# Altium PCB ControlAccess.PcbDoc
Units mil, origin at the board's own origin, x right, y up, seen from the top; angles counter-clockwise.
Board outline 2680.03 x 3305.03 mil, 2 copper layers (Top Layer, Bottom Layer); 16 components, 21 nets, 94 pads, 0 vias.
Unrouted connection lines stored in the file: 5.
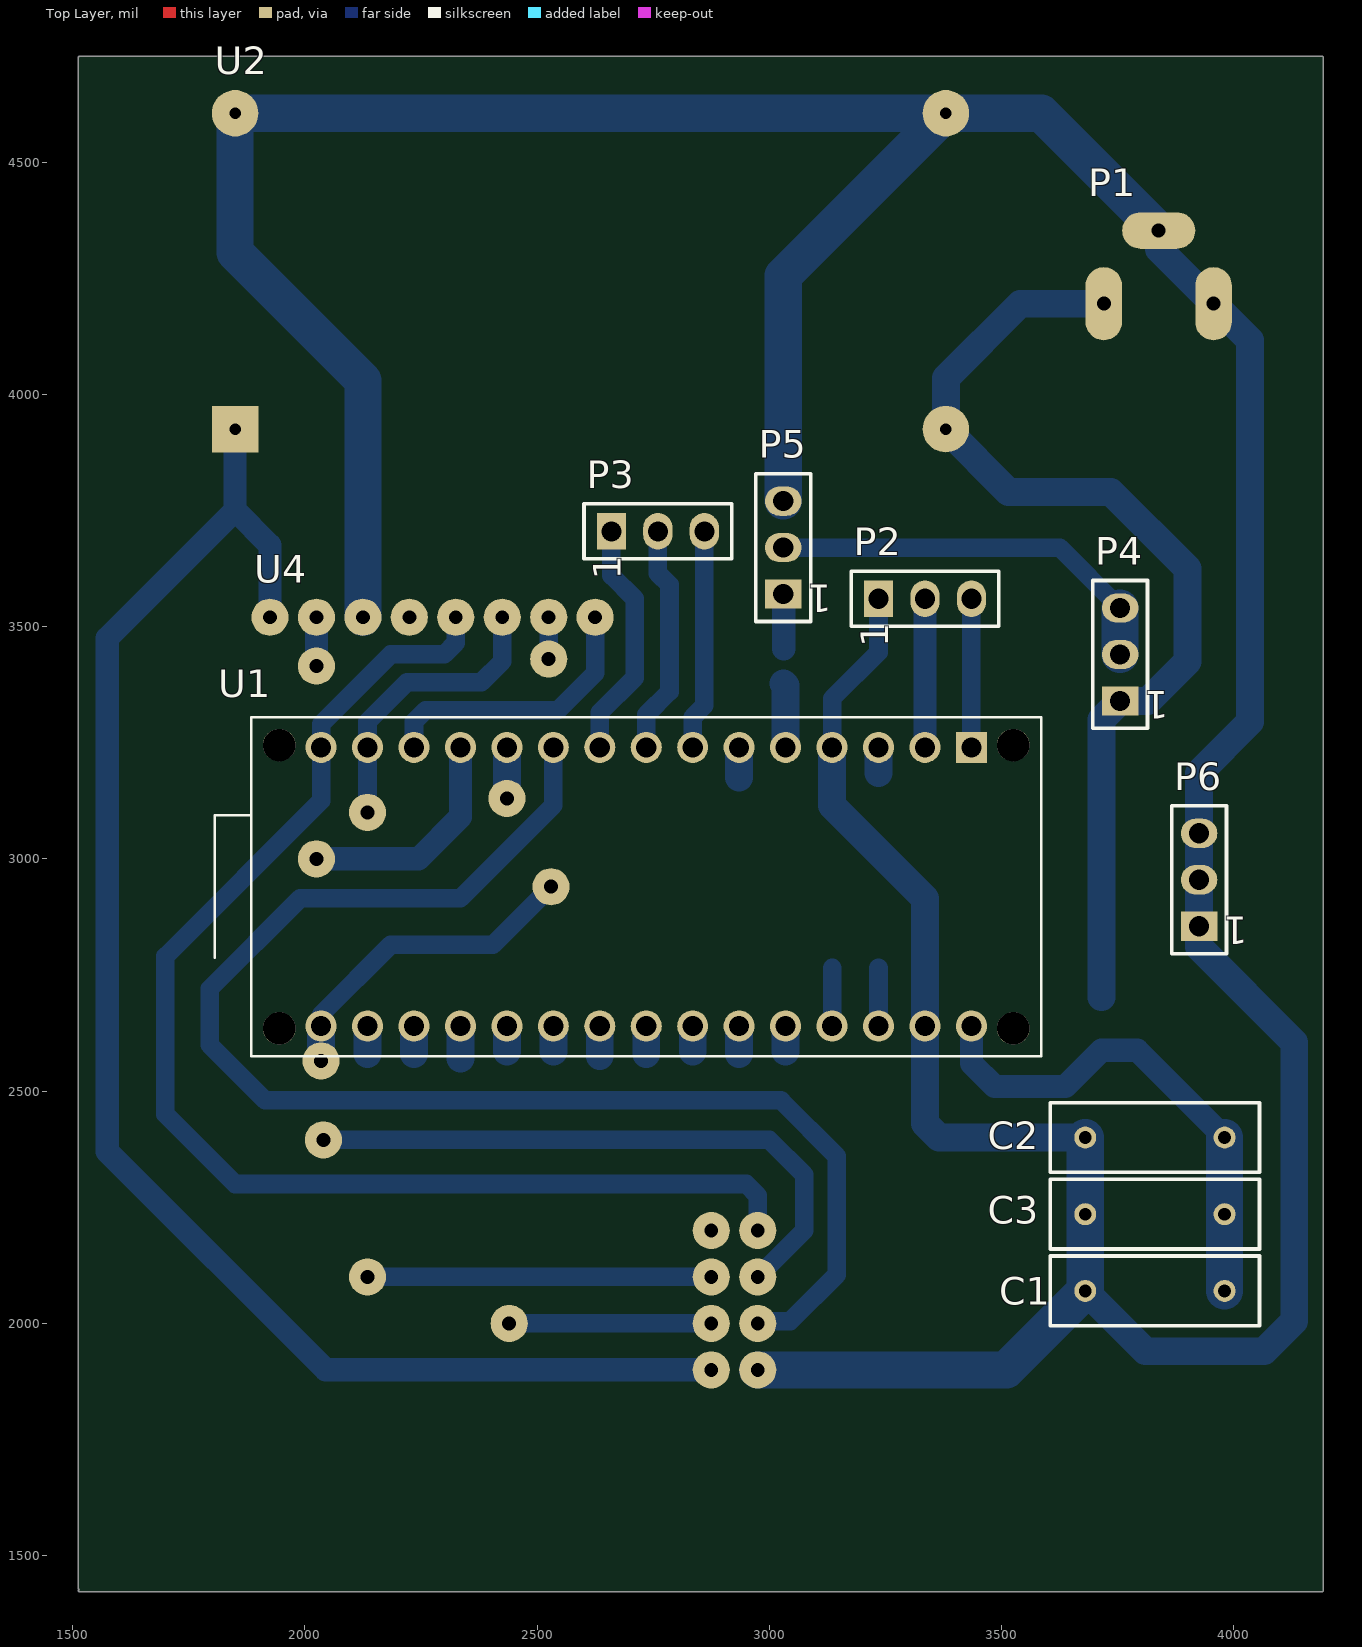
[diagram p0: Top Layer view]
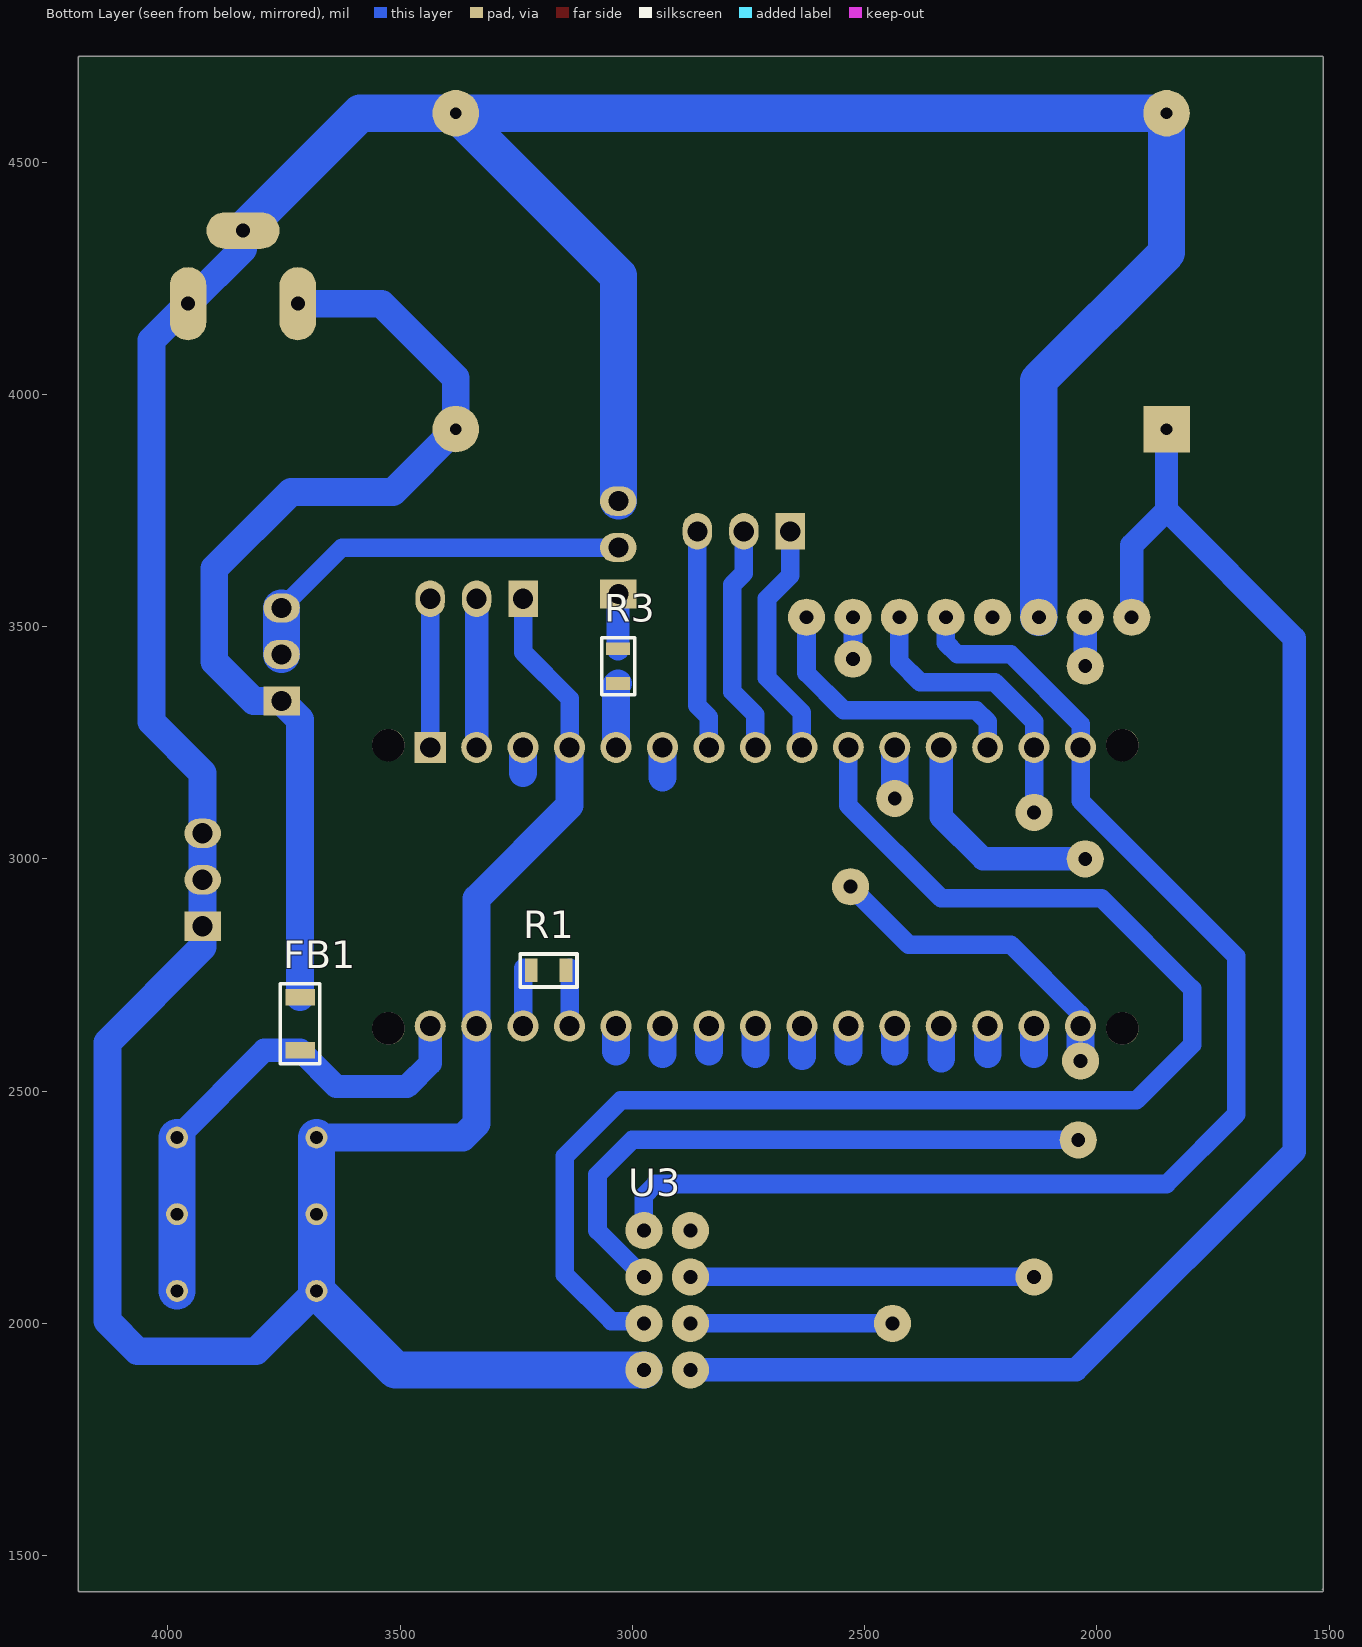
[diagram p1: Bottom Layer view, seen from below]
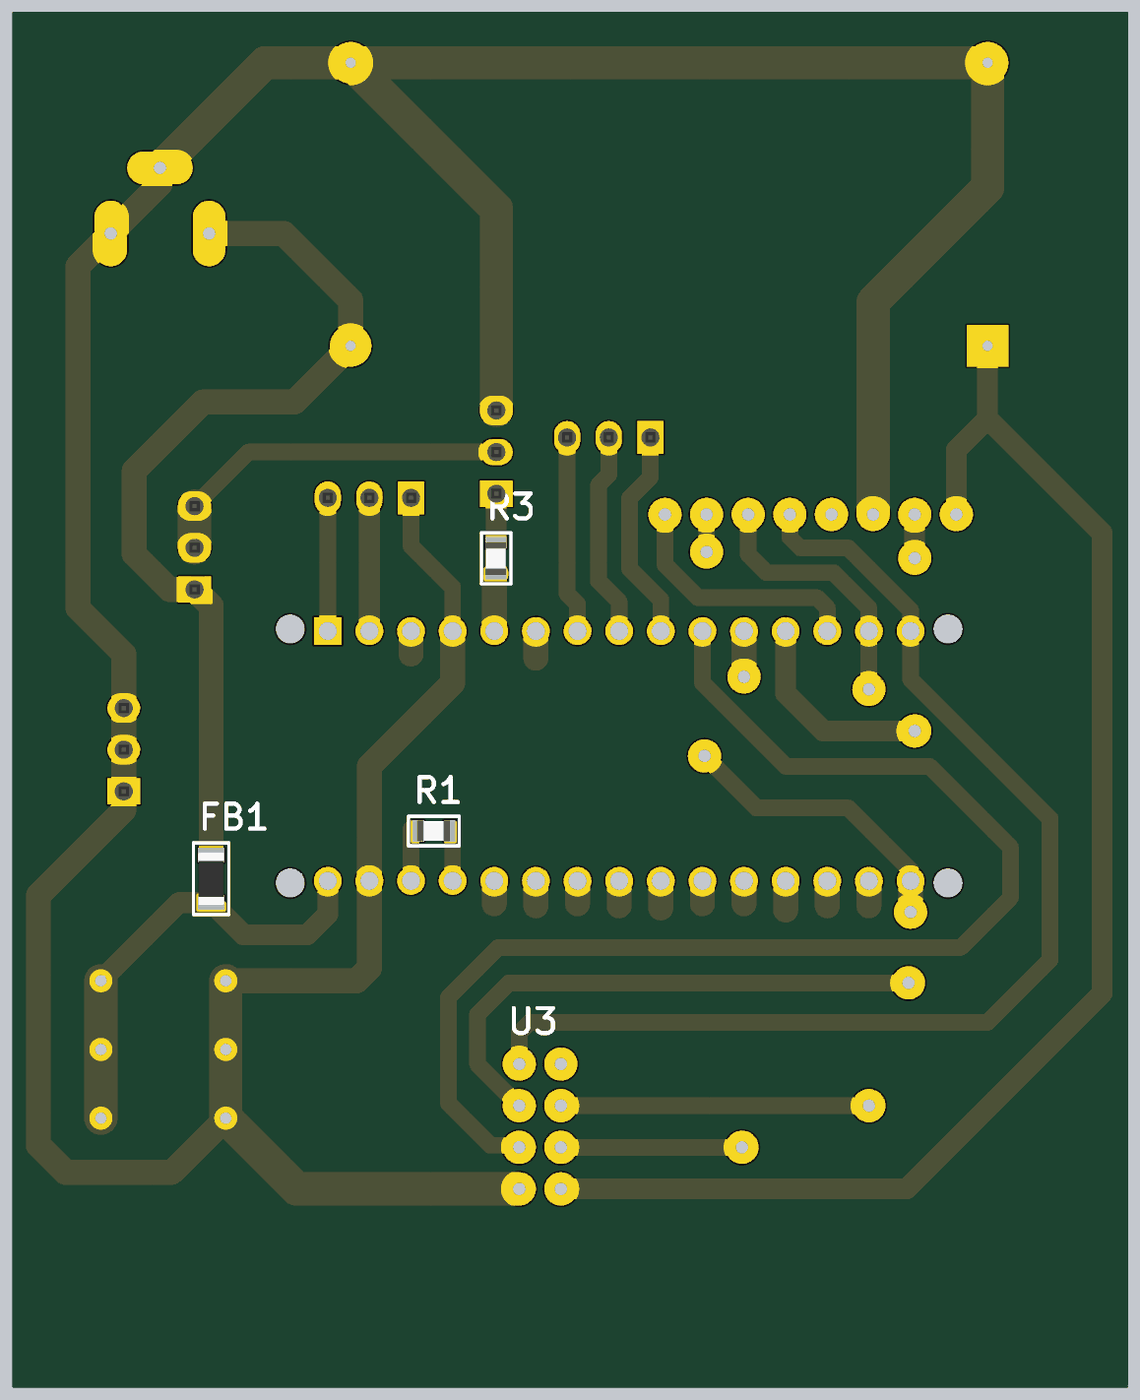
[diagram p2: 3D render of the assembled board from below, using the file's embedded part models]

## Layer stack, top to bottom
Top Solder: solder mask 0.4, Solder Resist, Dk 3.5
Top Layer: signal copper 1.4
Dielectric 1: dielectric 12.6, FR-4, Dk 4.8
Bottom Layer: signal copper 1.4
Bottom Solder: solder mask 0.4, Solder Resist, Dk 3.5

## Board outline
1514.73,1427.5 cw(c1515,1430) 1512.48,1430 1512.48,4725 cw(c1515,4725) 1515,4727.52 4190,4727.52 cw(c4190,4725) 4192.52,4725 4192.52,1425 cw(c4190,1425) 4190,1422.48 1515,1422.48 cw(c1515,1425)

## Design rules (kind name [scope] priority, off if disabled: settings)
Clearance [All] p1: gap=10 ignorepadtopadclearanceinfootprint=FALSE except(0: Arc-Hole Track-Hole SMDPad-Hole THPad-Hole Via-Hole Fill-Hole Poly-Hole Region-Hole Text-Hole)
PolygonConnect [All] p1: connectstyle=Relief reliefconductorwidth=10 reliefentries=4 polygonreliefangle="90 Angle" airgapwidth=10
RoutingVias [All] p1: holewidth=28 width=50 viastyle="Through Hole" minholewidth=28 minwidth=50 maxholewidth=28 maxwidth=50
SolderMaskExpansion [All] p1: expansion=4
Width [All] p1: maxlimit=80 minlimit=20 preferedwidth=40 minimp=50.000000 maximp=50.000000 favimp=50.000000
30 further rules are at their usual default settings.

## Components (designator, comment, footprint, x,y, rotation, side; value= is the part's Value field where it differs from the comment)
C1 "Cap" RAD-0.3 3830,2070 r0 top value=100pF
C2 "Cap" RAD-0.3 3830,2400 r0 top value=100pF
C3 "Cap" RAD-0.3 3830,2235 r0 top value=100pF
FB1 "ILHB1206ER601V" FB1206 3715,2645 r90 bottom
P1 "Socket" Clema 3720,4195 r90 top
P2 "3 Pin" PIN_HEADER_3 3235,3560 r90 top
P3 "3 Pin" PIN_HEADER_3 2660,3705 r90 top
P4 "3 Pin" PIN_HEADER_3 3755,3340 r180 top
P5 "3 Pin" PIN_HEADER_3 3030,3570 r180 top
P6 "3 Pin" PIN_HEADER_3 3925,2855 r180 top
R1 "0Ω" RES0805 3180,2760 r0 bottom
R3 "0Ω" RES0805 3030.79,3415 r270 bottom
U1 "A000005" ARDUINO_A000005 2735,2940 r270 top
U2 "LM2596" LM2596 1850,3925 r90 top
U3 "NRF24L01" NRF24L01 2875,1900 r90 bottom
U4 "RFID" RFID 1925,3520 r0 top

## Footprints (in the part's own frame and the unit in brackets; to place one, negate y for a bottom-side part, rotate by r counter-clockwise, add the part's x,y. Pads: shape width x height; smd on the part's side, far side on the other; paste and mask are expansions set on the pad)
ARDUINO_A000005 [mm]
  rect 1.7x1.7 hole 1.1: 1(-7.62,17.78)
  round 1.7 hole 1.1: 2(-7.62,15.24) 3(-7.62,12.7) 4(-7.62,10.16) 5(-7.62,7.62) 6(-7.62,5.08) 7(-7.62,2.54) 8(-7.62,0) 9(-7.62,-2.54) 10(-7.62,-5.08) 11(-7.62,-7.62) 12(-7.62,-10.16) 13(-7.62,-12.7) 14(-7.62,-15.24) 15(-7.62,-17.78) 16(7.62,-17.78) 17(7.62,-15.24) 18(7.62,-12.7) 19(7.62,-10.16) 20(7.62,-7.62) 21(7.62,-5.08) 22(7.62,-2.54) 23(7.62,0) 24(7.62,2.54) 25(7.62,5.08) 26(7.62,7.62) 27(7.62,10.16) 28(7.62,12.7) 29(7.62,15.24) 30(7.62,17.78)
  round 1.778 hole 1.778 unplated: None(-7.747,20.066) None(-7.747,-20.066) None(7.747,20.066) None(7.747,-20.066)
  silkscreen extent -9.27,-23.59 9.27,21.59
Clema [mm]
  oval 4x2 hole 0.762: 1(0,0) 2(0,-6)
  oval 2x4 hole 0.762: 3(4,-3)
FB1206 [mm]
  rect 0.9x1.6 smd: 1(-1.45,0) 2(1.45,0)
  silkscreen extent -2.18,-1.08 2.19,1.08, body extent -1.6,-0.8 1.6,0.8, height 1.1
LM2596 [mil]
  rect 100x100 hole 25: 1(0,0)
  round 100 hole 25: 2(0,-1530) 3(680,-1530) 4(680,0)
NRF24L01 [mil]
  round 80 hole 30: 1(0,0) 2(100,0) 3(200,0) 4(300,0) 5(300,100) 6(200,100) 7(100,100) 8(0,100)
PIN_HEADER_3 [mm]
  rect 2x1.6 hole 1.1: 1(0,0)
  oval 2x1.6 hole 1.1: 2(0,-2.54) 3(0,-5.08)
  silkscreen extent -1.5,-6.58 1.5,1.5, body extent -1.27,-6.35 1.27,1.27, height 9.5
RAD-0.3 [mm] "Radial Cap, Thru-Hole; 2 Leads; 0.3 in Pin Spacing"
  round 1.2 hole 0.7: 1(-3.81,0) 2(3.81,0)
  silkscreen extent -5.71,-1.91 5.71,1.91
RES0805 [mm]
  rect 0.7x1.3 smd: 1(-0.95,0) 2(0.95,0)
  silkscreen extent -1.55,-0.89 1.56,0.91, body extent -0.97,-0.64 1.03,0.62, height 0.43
RFID [mil]
  round 80 hole 30: 1(0,0) 2(100,0) 3(200,0) 4(300,0) 5(400,0) 6(500,0) 7(600,0) 8(700,0)

## Part data
C1 C2 C3: "Capacitor", LatestRevisionDate=17-Jul-2002, LatestRevisionNote="Re-released for DXP Platform.", PackageDescription="Radial Cap, Thru-Hole; 2 Leads; 0.3 in Pin Spacing", PackageReference=RAD-0.3, Published=8-Jun-2000, Publisher="Altium Limited"
FB1: "Ferrite Beads Multi-Layer High Current 600Ohm 25% 100MHz 2.5A 100mOhm DCR 1206 T/R", Case Size (Inches)=1206, DC Current="2500 mA", DC Resistance="0.1 ohm", Inductance="Not Required uH", Manufacturer=Vishay, Operating Temp Range="-55C to 125C", Supplier Part Number 1=55M4339, Test Frequency="100 MHz", Tolerance (+ or -)=25%, ComponentLink1Description=https://datasheet.ciiva.com/3854/ilhb-3854096.pdf, ComponentLink1URL=https://datasheet.ciiva.com/3854/ilhb-3854096.pdf, ComponentLink2Description=https://datasheet.ciiva.com/46636/ilhb-46636117.pdf, ComponentLink2URL=https://datasheet.ciiva.com/46636/ilhb-46636117.pdf, ComponentLink3Description=https://datasheet.ciiva.com/7620/ilhb-7620251.pdf, ComponentLink3URL=https://datasheet.ciiva.com/7620/ilhb-7620251.pdf, ComponentLink4Description=https://datasheet.ciiva.com/6212/ilhb-6212044.pdf, ComponentLink4URL=https://datasheet.ciiva.com/6212/ilhb-6212044.pdf, ComponentLink5Description=https://datasheet.ciiva.com/15160/getdatasheetpartid-45507-15160140.pdf, ComponentLink5URL=https://datasheet.ciiva.com/15160/getdatasheetpartid-45507-15160140.pdf, ComponentLink6Description=https://datasheet.ciiva.com/8494/ilhb-8494783.pdf, ComponentLink6URL=https://datasheet.ciiva.com/8494/ilhb-8494783.pdf, Core Material=Ferrite, DELETED=Compliant, Failure Rate="Not Required", Impedance="600 ohm", Manufacturer Part Number=ILHB1206ER601V, Military Standard="Not Required", Packaging="Tape and Reel", Product Depth (mm)="1.8 mm", Product Diameter (mm)="Not Required mm", Product Height (mm)="1.3 mm", Product Length (mm)="3.4 mm", Rad Hardened=No, Shielding=Shielded, Stock 1=0, Supplier 1=Newark, Technology=Multi-Layer, Type="High Current Bead"
P2 P3 P4 P5 P6: library part M20-9990246, "Headers & Wire Housings 02 SIL VERTICAL PIN HEADER TIN", Color=Black, Manufacturer=Harwin, Standard Package=1,000, Supplier Part Number 1=952-2262-ND, Category="Connectors, Interconnects", ComponentLink1Description=https://datasheet.ciiva.com/8046/315376-8046930.pdf, ComponentLink1URL=https://datasheet.ciiva.com/8046/315376-8046930.pdf, ComponentLink2Description=https://datasheet.ciiva.com/6833/m20-999-6833368.pdf, ComponentLink2URL=https://datasheet.ciiva.com/6833/m20-999-6833368.pdf, ComponentLink3Description=https://datasheet.ciiva.com/11745/0900766b81034e61-11745755.pdf, ComponentLink3URL=https://datasheet.ciiva.com/11745/0900766b81034e61-11745755.pdf, ComponentLink4Description=https://datasheet.ciiva.com/22660/1830818-22660571.pdf, ComponentLink4URL=https://datasheet.ciiva.com/22660/1830818-22660571.pdf, ComponentLink5Description=https://datasheet.ciiva.com/26852/getdatasheetpartid-384170-26852203.pdf, ComponentLink5URL=https://datasheet.ciiva.com/26852/getdatasheetpartid-384170-26852203.pdf, Connector Type="Header, Unshrouded, Breakaway", Contact Finish=Tin, Contact Mating Length="0.240\" (6.10mm)", Contact Type="Male Pin", Dynamic Catalog="M20 Series", Family="Rectangular Connectors - Headers, Male Pins", Manufacturer Part Number=M20-9990246, Mating Products="952-2227-ND / - SIL FEMALE CRIMP HOUSING 2POS / 952-1776-ND / - 02-WAY SIL VERT SOCKET L/FREE / 952-1775-ND / - 02-WAY SIL VERT SOCKET L/FREE / 952-1774-ND / - 02-WAY SIL HORIZ SOCKET L/FREE", Mounting Type="Through Hole", Number of Positions=2, Number of Positions Loaded=All, Number of Rows=1, Other Names=952-2262, Packaging=Bulk, Pitch="0.100\" (2.54mm)", Pricing 1="1=0.11, 10=0.099, 100=0.0609, 500=0.0504, 1000=0.0441, 5000=0.0378, 10000=0.0368 (USD)", Series=M20, Stock 1=38058, Supplier 1=Digi-Key, Termination=Solder
R1 R3: library part CRT0805-FZ-1002ELF, "RES SMD 10K OHM 1% 1/10W 0805", Case Code - in=0805, Case Code - mm=2012, Case Height="0.55 mm", Case Length="2 mm", Case Width="1.25 mm", Manufacturer=Bourns, Operating Temperature Range="- 55 C to + 155 C", Package / Case="0805 (2012 metric)", Power Rating="100 mW", Resistance="10 kOhms", Supplier Part Number 1=CRT0805-FZ-1002ELFCT-ND, Temperature Coefficient="50 PPM / C", Tolerance="1 %", Voltage Rating="100 V", Categoria prodotto="Resistori a pellicola sottile - SMD", ComponentLink1Description=https://datasheet.ciiva.com/6548/crt-6548135.pdf, ComponentLink1URL=https://datasheet.ciiva.com/6548/crt-6548135.pdf, ComponentLink2Description=https://datasheet.ciiva.com/6548/crt-6548136.pdf, ComponentLink2URL=https://datasheet.ciiva.com/6548/crt-6548136.pdf, ComponentLink3Description=https://datasheet.ciiva.com/6548/crt-6548137.pdf, ComponentLink3URL=https://datasheet.ciiva.com/6548/crt-6548137.pdf, ComponentLink4Description=https://datasheet.ciiva.com/11810/0900766b80dd0f79-11810955.pdf, ComponentLink4URL=https://datasheet.ciiva.com/11810/0900766b80dd0f79-11810955.pdf, Confezione=Reel, Dimensions="1.25 mm W x 2 mm L x 0.55 mm H", Manufacturer Part Number=CRT0805-FZ-1002ELF, Package/involucro="0805 (2012 metric)", Packaging=Reel, Potenza nominale="125 mW (1/8 W)", Pricing 1="1=0.19, 10=0.157, 25=0.1144, 50=0.083, 100=0.0615, 250=0.0472, 500=0.0372, 1000=0.0257 (USD)", Product="Precision Resistors Thin Film SMD", Product Category="Thin Film Resistors - SMD", Produttore=Bourns, Range di temperatura di lavoro="- 55 C to + 155 C", Resistenza="10 kOhms", RoHS=Dettagli, Series=CRT, Stile di terminazione=SMD/SMT, Stock 1=9449, Supplier 1=Digi-Key, Termination Style=SMD/SMT, Tolleranza="1 %", Type="Thin Film Precision Chip Resistor"
U1: "MICRO, ARDUINO NANO 3.0, MINI-B USB, ATmega328, 0.1DIP, ICSP HDR", Package=None, Availability=Good, MF=Arduino, MP=A000005, Price="22.93 USD", SnapEDA_Link=https://www.snapeda.com/symbols-footprints/A000005/Arduino/view-part/?ref=snap

## Free pads (board coordinates)
  round 80 hole 30: 2(2040,2395) 3(2035,2565) 4(2135,2100) 5(2440,2000) 6(2435,3130) 7(2135,3100) 8(2025,3415) 9(2025,3000) 10(2530,2940) 11(2525,3430)

## Nets (pads, with @x,y where several pads share a name; then routed paths per layer and width w, separated by ;. In a path a pad name is that pad's centre, name@x,y a point inside that pad or via, vN(x,y) a via of type N, cw(c..) or ccw(c..) an arc to the next point about the centre after c; other vN are vias at no path point)
5v: R1.1 U1.27 | length 125
  Bottom Layer w40: U1.27 R1.1@3135,2765
Door: R3.2 U1.5 | length 139.3
  Bottom Layer w60: R3.2 3035,3373.39 U1.5
Drain: P4.2 P4.3 P5.2 | length 878.8
  Bottom Layer w40: P5.2 3625,3670 P4.3
  Bottom Layer w80: P4.2 P4.3
Gate: P5.1 R3.1 | length 117.9
  Bottom Layer w50: P5.1 3030.79,3569.21 R3.1
GND: C1.1 C2.1 C3.1 P1.2 P1.3 P2.1 P5.3 P6.1 P6.2 P6.3 U1.4 U1.29 U2.3 U2.4 U3.8 U4.3 | length 10079
  Bottom Layer w40: U1.4 3135,3345 3235,3445 P2.1
  Bottom Layer w60: U1.4 3135,3115 3335,2915 U1.29 3335,2430 3365,2400 C2.1 ; C1.1 3810,1940 4065,1940 4130,2005 4130,2605 3925,2810 P6.1 P6.2 P6.3 3925,3185 4035,3295 4035,4116.22 P1.2 3838.11,4313.11 P1.3
  Bottom Layer w80: U4.3 2125,4030 1850,4305 U2.4 U2.3 ; U3.8 3510,1900 C1.1 C3.1 C2.1 ; P5.3 3030,4255 U2.3 ; P1.3 3585.59,4605 U2.3
MISO: U1.15 U3.5 U4.5 | length 2818.7
  Bottom Layer w40: U4.5 2325,3465 2300,3440 2185,3440 2035,3290 U1.15 2035,3125 1700,2790 1700,2450 1850,2300 2950,2300 2975,2275 U3.5
MOSI: pad.4 pad.7 U1.14 U3.3 U4.6 | length 1368.8
  Bottom Layer w40: pad.7 U1.14 2135,3295 2220,3380 2380,3380 2425,3425 U4.6 ; pad.4@2140,2100 U3.3
NetC1_2: C1.2 C2.2 C3.2 FB1.1 U1.30 | length 1085.8
  Bottom Layer w50: U1.30 3435,2560 3485,2510 3637.09,2510 FB1.1 3792.09,2587.91 C2.2
  Bottom Layer w80: C1.2 C3.2 C2.2
NetP2_2: P2.2 U1.2 | length 320
  Bottom Layer w50: U1.2 P2.2
NetP2_3: P2.3 U1.1 | length 320
  Bottom Layer w40: U1.1 P2.3
NetP3_1: P3.1 U1.9 | length 516.8
  Bottom Layer w40: U1.9 2635,3315 2710,3390 2710,3560 2660,3610 P3.1
NetP3_2: P3.2 U1.8 | length 496.1
  Bottom Layer w40: U1.8 2735,3310 2785,3360 2785,3590 2760,3615 P3.2
NetP3_3: P3.3 U1.7 | length 475.4
  Bottom Layer w40: U1.7 2835,3305 2860,3330 P3.3
NetR1_2: R1.2 U1.28 | length 125
  Bottom Layer w40: U1.28 3235,2765
RF_CE: U1.10 U3.7 | length 3066.5
  Bottom Layer w40: U1.10 2535,3115 2335,2915 1990,2915 1795,2720 1795,2600 1915,2480 3025,2480 3145,2360 3145,2105 3045,2005 2980,2005 U3.7
RF_CSN: pad.5 pad.6 U1.11 U3.2 | length 545
  Bottom Layer w40: pad.5 U3.2
  Bottom Layer w60: pad.6 U1.11
RFID_RST: pad.8 pad.9 U1.12 U4.2 | length 592.3
  Bottom Layer w50: pad.9 2245,3000 2335,3090 U1.12 ; pad.8@2025,3425 U4.2
RFID_SDA: U1.13 U4.8 | length 608.5
  Bottom Layer w40: U1.13 2235,3295 2260,3320 2545,3320 2625,3400 U4.8
SCK: pad.2 pad.3 pad.10 pad.11 U1.16 U3.6 U4.7 | length 2126.4
  Bottom Layer w40: U1.16 2035,2665 2185,2815 2405,2815 pad.10 ; pad.2 3000,2395 3075,2320 3075,2200 U3.6 ; pad.11 U4.7
  Bottom Layer w60: pad.3 U1.16
VCC: U2.1 U3.1 U4.1 | length 3424.7
  Bottom Layer w50: U2.1 1850,3750 ; U4.1 1925,3675 1850,3750 ; U3.1 2045,1900 1575,2370 1575,3475 1850,3750
Vin: FB1.2 P1.1 P4.1 U2.2 | length 2195.2
  Bottom Layer w60: FB1.2 3715,3300 P4.1 3815,3340 3900,3425 3900,3625 3735,3790 3515,3790 U2.2 3380,4035 3540,4195 P1.1
pads on no net: U1.3 U1.6 U1.17 U1.18 U1.19 U1.20 U1.21 U1.22 U1.23 U1.24 U1.25 U1.26 U1.None U3.4 U4.4
copper on no net: | length 715
  Bottom Layer w60: 2135,2580 2135,2640 ; 2235,2580 2235,2640 ; 2335,2570 2335,2640 ; 2435,2585 2435,2640 ; 2535,2585 2535,2640 ; 2635,2575 2635,2640 ; 2735,2580 2735,2640 ; 2835,2585 2835,2640 ; 2935,2580 2935,2640 ; 2935,3175 2935,3240 ; 3035,2585 3035,2640 ; 3235,3185 3235,3240

## Text inside footprints (layer, text, board x,y; h text height)
P2: Top Overlay "1" at 3255.47,3455.28 h60 r90
P3: Top Overlay "1" at 2680.47,3600.28 h60 r90
P4: Top Overlay "1" at 3859.72,3360.47 h60 r180
P5: Top Overlay "1" at 3134.72,3590.47 h60 r180
P6: Top Overlay "1" at 4029.72,2875.47 h60 r180